# Altium PCB 四路12V30A无线遥控控制板.PcbDoc
Units mm, origin at the board's own origin, x right, y up, seen from the top; angles counter-clockwise.
Board outline 254.38 x 101.09 mm, 2 copper layers (Top Layer, Bottom Layer); 45 components, 31 nets, 137 pads, 8 vias.
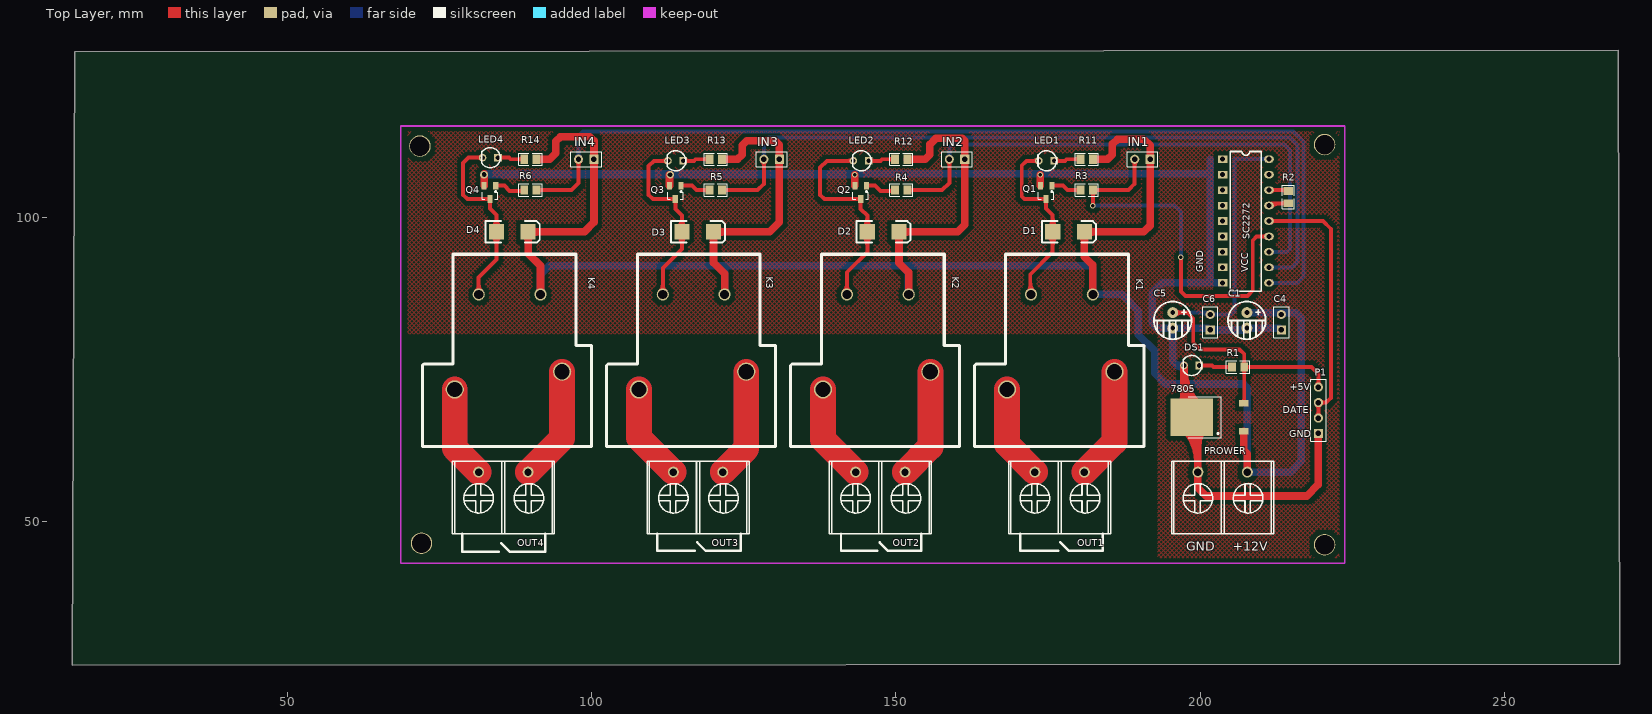
[diagram p0: Top Layer view]
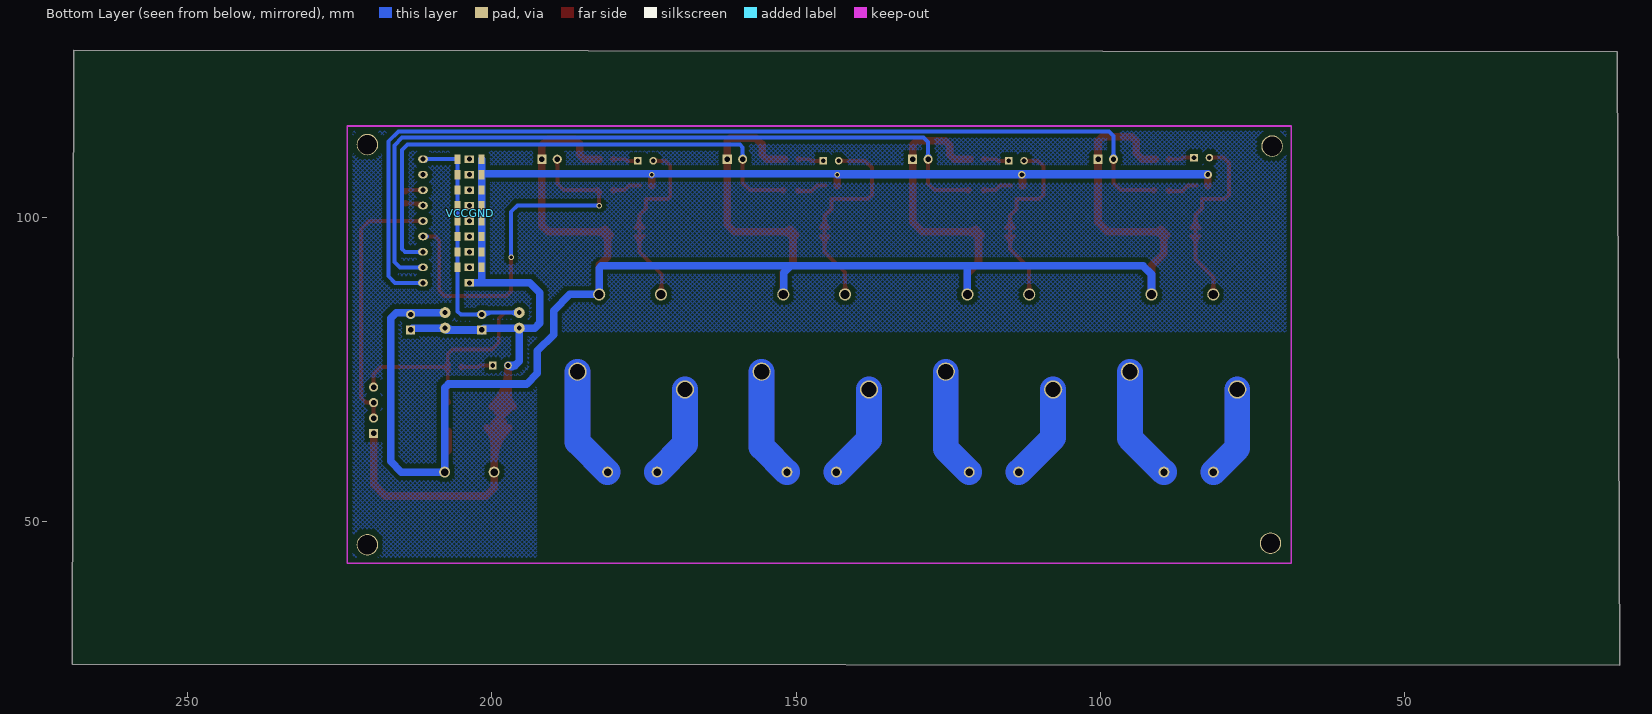
[diagram p1: Bottom Layer view, seen from below]

## Layer stack, top to bottom
Top Layer: signal copper 0.0356
Dielectric: dielectric 0.32, FR-4, Dk 4.8
Bottom Layer: signal copper 0.0356

## Board outline
14.605,26.416 268.986,26.543 268.732,127.508 14.986,127.254

## Design rules (kind name [scope] priority, off if disabled: settings)
Clearance [All] p1: gap=0.654
PolygonConnect [All] p1: connectstyle=Relief reliefconductorwidth=0.254 reliefentries=4 polygonreliefangle="90 Angle"
RoutingVias [All] p1: holewidth=0.711 width=1.27 viastyle="Through Hole" minholewidth=0.711 minwidth=1.27 maxholewidth=0.711 maxwidth=1.27
SilkscreenOverComponentPads [All] p1: minsilkscreentomaskgap=0.254
SolderMaskExpansion [All] p1: expansion=0.102
TestPointUsage [All] p1: valid=0 allowmultiple=FALSE
Testpoint [All] p1: side=15 testpointundercomponent=TRUE minsize=1.016 maxsize=2.54 preferedsize=1.524 minholesize=0 maxholesize=1.016 preferedholesize=0.813 testpointgrid=0.025 style=1023 order=0123456789
Width Width_2 [InNetClass('1mm')] p1: maxlimit=1.254 minlimit=1.254 preferedwidth=1.254
Width Width_1 [InNetClass('4mm')] p2: maxlimit=4.254 minlimit=4.254 preferedwidth=4.254
Width [All] p3: maxlimit=0.654 minlimit=0.654 preferedwidth=0.654
23 further rules are at their usual default settings.

## Classes and differential pairs
net class 4mm: NetK1_3 NetK1_4 NetK2_3 NetK2_4 NetK3_3 NetK3_4 NetK4_3 NetK4_4
net class 1mm: +12V GND

## Components (designator, comment, footprint, x,y, rotation, side; value= is the part's Value field where it differs from the comment)
7805 "SDWYG" 78XX 201.168,67.056 r90 top
C1 "DJDR" C-DJ-6 207.772,81.788 r270 top
C4 "CPDR" CPDR 213.36,82.804 r90 top
C5 "DJDR" C-DJ-6 195.58,81.788 r270 top
C6 "CPDR" CPDR 201.676,82.804 r90 top
D1 "ZL2JG" 7227 180.855,97.661 r0 top
D2 "ZL2JG" 7227 150.375,97.661 r0 top
D3 "ZL2JG" 7227 119.895,97.661 r0 top
D4 "ZL2JG" 7227 89.415,97.661 r0 top
DS1 "LED" LED_D 198.12,74.168 r180 top
GND "Header 8" P8 199.149,96.906 r180 top
IN1 "PZ_2" HDR-2 187.96,110.744 r180 top
IN2 "PZ_2" HDR-2 157.48,110.744 r180 top
IN3 "PZ_2" HDR-2 127,110.744 r180 top
IN4 "PZ_2" HDR-2 96.52,110.744 r180 top
K1 "JDQ1K" SLA-12VDC-SL-A 186.054,76.198 r180 top
K2 "JDQ1K" SLA-12VDC-SL-A 155.788,76.198 r180 top
K3 "JDQ1K" SLA-12VDC-SL-A 125.523,76.198 r180 top
K4 "JDQ1K" SLA-12VDC-SL-A 95.257,76.198 r180 top
LED1 "" LED_D 174.251,107.821 r180 top
LED2 "" LED_D 143.771,107.821 r180 top
LED3 "" LED_D 113.291,107.821 r180 top
LED4 "" LED_D 82.811,108.329 r180 top
OUT1 "PZ_2" KF8500-2 180.975,58.166 r270 top
OUT2 "PZ_2" KF8500-2 151.511,58.166 r270 top
OUT3 "PZ_2" KF8500-2 121.539,58.166 r270 top
OUT4 "PZ_2" KF8500-2 89.535,58.166 r270 top
P1 "Header 4" HDR1X4 219.456,64.516 r90 top
PROWER "PZ_2" KF8500-2 207.772,58.166 r270 top (schematic designator JP1)
Q1 "NPN" SO-G3 173.743,104.265 r180 top
Q2 "NPN" SO-G3 143.263,104.265 r180 top
Q3 "NPN" SO-G3 112.783,104.265 r180 top
Q4 "NPN" SO-G3 82.303,104.265 r180 top
R1 "Res" TP-0805-R 208.788,74.168 r0 top
R2 "Res2" TP-0805-R 213.233,100.838 r270 top
R3 "Res" TP-0805-R 183.903,103.249 r0 top
R4 "Res" TP-0805-R 153.423,103.249 r0 top
R5 "Res" TP-0805-R 122.943,103.249 r0 top
R6 "Res" TP-0805-R 92.463,103.249 r0 top
R11 "Res" TP-0805-R 183.903,108.329 r0 top
R12 "Res" TP-0805-R 153.423,108.329 r0 top
R13 "Res" TP-0805-R 122.943,108.329 r0 top
R14 "Res" TP-0805-R 92.463,108.329 r0 top
SC2272 "SC2272" DIP18 203.713,109.606 r0 top
VCC "Header 8" P8 203.097,96.906 r180 top

## Footprints (in the part's own frame and the unit in brackets; to place one, negate y for a bottom-side part, rotate by r counter-clockwise, add the part's x,y. Pads: shape width x height; smd on the part's side, far side on the other; paste and mask are expansions set on the pad)
78XX [mm] "78XX稳压器"
  rect 1.1x1.55 smd: 1(-2.186,-6.029) 2(2.414,-6.029)
  rect 6.2x7 smd: 3(0.127,2.54)
  silkscreen extent -3.24,-2.35 3.46,3.13
7227 [mm]
  rect 2.5x2.54 smd: 1(0.127,0) 2(-5.08,0)
  silkscreen extent -6.86,-1.78 2.03,1.78
C-DJ-6 [mm] "电容6mm"
  round 1.8 hole 0.8: 1(-2.591,-0.076) 2(-0.051,-0.076)
  silkscreen extent -4.42,-3.18 1.78,3.02
CPDR [mm] "瓷片电容"
  rect 1.5x1.5 hole 0.9: 1(-1.27,0)
  round 1.5 hole 0.9: 2(1.27,0)
  silkscreen extent -2.54,-1.27 2.54,1.27
DIP18 [mil] "直插18管脚"
  rect 62x49.21 hole 32: 1(-0.15,-0.04) 2(-0.15,-100.04) 3(-0.15,-200.04) 4(-0.15,-300.04) 5(-0.15,-400.04) 6(-0.15,-500.04) 7(-0.15,-600.04) 8(-0.15,-700.04) 9(0,-800)
  oval 62x49.21 hole 32: 10(300,-800) 11(300,-700) 12(300,-600) 13(300,-500) 14(300,-400) 15(300,-300) 16(300,-200) 17(300,-100) 18(300,0)
  silkscreen extent 50,-855 250,50
HDR1X4 [mm] "Connector; Header; 4 Position"
  rect 1.5x1.5 hole 0.9: 1(0,0)
  round 1.5 hole 0.9: 2(2.54,0) 3(5.08,0) 4(7.62,0)
  silkscreen extent -1.27,-1.27 8.89,1.27
HDR-2 [mm] "2排针"
  rect 1.5x1.5 hole 0.9: 1(-3.84,1.148)
  round 1.5 hole 0.9: 2(-1.3,1.148)
  silkscreen extent -5.11,-0.12 -0.03,2.42
KF8500-2 [mm] "2P螺丝端子"
  round 1.8 hole 1.2: 1(0,0) 2(0,-8.128)
  silkscreen extent -1.78,-12.45 10.16,4.32
LED_D [mm] "发光二极管_3mm"
  rect 1.25x1.25 hole 0.75: 1(-1.778,-1.524)
  round 1.25 hole 0.75: 2(0.762,-1.524)
  silkscreen extent -2.16,-3.17 0.89,0.13
P8 [mil] "裸露焊盘"
  rect 39.37x60 smd far side: 1(-100,200) 2(-100,100) 3(-100,0) 4(-100,-100) 5(-100,-200) 6(-100,-300) 7(-100,-400) 8(-100,-500)
SLA-12VDC-SL-A [mm] "继电器"
  round 2 hole 1.5: 1(3.683,-11.176) 2(13.843,-11.176)
  round 3 hole 2.5: 3(17.78,4.445) 4(0.127,1.524)
  silkscreen extent -4.7,-17.78 23.11,13.84
SO-G3 [mm] "贴片三极管"
  rect 0.85x1.3 smd: 1(-1.9,-0.983) 2(0,-0.983) 3(-0.95,1.217)
  silkscreen extent -2.23,-0.12 0.32,1.22
TP-0805-R [mm] "贴片0805"
  rect 1.3x1.5 smd: 1(-3.556,1.27) 2(-1.524,1.27)
  silkscreen extent -4.44,0.25 -0.64,2.29

## Part data
7805: "三端稳压器"
C1 C5: "电解电容"
C4 C6: "瓷片电容"
D1 D2 D3 D4: "整流二极管"
DS1: "发光二极管"
GND VCC: "Header, 8-Pin"
IN1 IN2 IN3 IN4 PROWER: "排针——2"
K1 K2 K3 K4: library part JDQYCK, "继电器——1常开1常闭"
LED1 LED2 LED3 LED4: library part LED, "发光二极管"
OUT1 OUT2 OUT3 OUT4: library part PZ_3, "排针——3"
P1: "Header, 4-Pin"
Q1 Q2 Q3 Q4: "NPN Bipolar Transistor"
R1 R3 R4 R5 R6 R11 R12 R13 R14: "电阻"
R2: "Resistor"
SC2272: "无线接收芯片"

## Free pads (board coordinates)
  round 3.524 hole 3.2: 0(71.755,111.76) 1(72.009,46.482) 2(220.472,112.014) 3(220.472,46.228)

## Via types
v1: diameter 0.9, hole 0.6, Top Layer to Bottom Layer, 6 vias
v2: diameter 1.27, hole 0.711, Top Layer to Bottom Layer, 2 vias

## Nets (pads, with @x,y where several pads share a name; then routed paths per layer and width w, separated by ;. In a path a pad name is that pad's centre, name@x,y a point inside that pad or via, vN(x,y) a via of type N, cw(c..) or ccw(c..) an arc to the next point about the centre after c; other vN are vias at no path point)
+5V: 7805.2 C5.1 C6.2 P1.4 R1.2 SC2272.18 VCC.1 VCC.2 VCC.3 VCC.4 VCC.5 VCC.6 VCC.7 VCC.8 | length 95.6
  Top Layer w0.654: C5.1 197.942,84.379 198.882,83.439 198.882,79.502 200.025,78.359 206.502,78.359 207.264,77.597 R1.2 ; C5.1@195.909,83.974 cw(c196.887,82.995) 196.887,84.379 cw(c196.887,85.762) C5.1@195.909,84.784 ; R1.2@207.036,75.11 cw(c206.484,74.558) 207.264,74.558 cw(c208.044,74.558) R1.2@207.492,75.11 ; R1.2@207.036,75.766 ccw(c206.484,76.318) 207.264,76.318 ccw(c208.044,76.318) R1.2@207.492,75.766 ; 7805.2@207.04,69.628 ccw(c206.498,70.17) 207.264,70.17 ; 7805.2 207.264,69.537 R1.2 ; R1.2@207.492,75.21 cw(c208.044,74.658) 208.044,75.438 cw(c208.044,76.218) R1.2@207.492,75.666 ; P1.4@219.157,72.435 ccw(c218.435,73.157) 219.456,73.157 ccw(c220.477,73.157) P1.4@219.755,72.435 ; P1.4 219.456,74.295 218.313,75.438 R1.2
  Bottom Layer w0.654: C5.1 201.371,84.379 C6.2 205.105,84.074 205.637,84.606 VCC.1 VCC.2 VCC.3 VCC.4 VCC.5 VCC.6 VCC.7 VCC.8 SC2272.18 ; C5.1@195.909,83.974 cw(c196.887,82.995) 196.887,84.379 cw(c196.887,85.762) C5.1@195.909,84.784 ; 199.919,84.379 cw(c199.919,82.317) C6.2@201.377,83.775 ; C6.2@201.975,83.775 cw(c202.697,83.053) 202.697,84.074 cw(c202.697,85.095) C6.2@201.975,84.373 ; SC2272.18@210.96,109.395 ccw(c210.451,108.887) 210.451,109.606 ccw(c210.451,110.325) SC2272.18@210.96,109.817
+12V: 7805.1 C1.1 C4.2 D1.1 D2.1 D3.1 D4.1 IN1.1 IN2.1 IN3.1 IN4.1 K1.1 K2.1 K3.1 K4.1 PROWER.1 R11.2 R12.2 R13.2 R14.2 | length 422
  Top Layer w1.254: D4.1@89.101,97.2 cw(c88.038,96.137) 89.542,96.137 cw(c91.046,96.137) D4.1@89.983,97.2 ; D4.1@89.983,97.22 cw(c91.046,96.157) 91.046,97.661 cw(c91.046,99.165) D4.1@89.983,98.102 ; R14.2 93.089,109.599 94.107,110.617 94.107,112.522 94.869,113.284 99.695,113.284 100.36,112.619 IN4.1 100.36,99.217 98.804,97.661 D4.1 89.542,94.1 91.574,92.068 K4.1 ; D3.1@119.581,97.2 cw(c118.518,96.137) 120.022,96.137 cw(c121.526,96.137) D3.1@120.463,97.2 ; D3.1@120.463,97.22 cw(c121.526,96.157) 121.526,97.661 cw(c121.526,99.165) D3.1@120.463,98.102 ; R13.2 123.95,109.599 124.714,110.363 124.714,111.887 125.476,112.649 130.175,112.649 130.84,111.984 IN3.1 130.84,99.217 129.284,97.661 D3.1 120.022,92.576 121.84,90.758 K3.1 ; D2.1@150.061,97.2 cw(c148.998,96.137) 150.502,96.137 cw(c152.006,96.137) D2.1@150.943,97.2 ; D2.1@150.943,97.22 cw(c152.006,96.157) 152.006,97.661 cw(c152.006,99.165) D2.1@150.943,98.102 ; R12.2 154.811,109.599 155.575,110.363 155.575,112.014 156.591,113.03 160.909,113.03 161.32,112.619 IN2.1 161.32,98.836 160.145,97.661 D2.1 150.502,92.576 152.105,90.973 K2.1 ; D1.1@180.541,97.2 cw(c179.478,96.137) 180.982,96.137 cw(c182.486,96.137) D1.1@181.423,97.2 ; D1.1@181.423,97.22 cw(c182.486,96.157) 182.486,97.661 cw(c182.486,99.165) D1.1@181.423,98.102 ; K1.1 182.371,92.203 180.982,93.592 D1.1 190.752,97.661 191.8,98.709 IN1.1 191.8,111.857 190.754,112.903 186.436,112.903 185.674,112.141 185.547,112.141 185.547,110.359 184.787,109.599 R11.2 ; 7805.1 207.197,61.789 207.772,61.214 PROWER.1
  Bottom Layer w1.254: K4.1 91.574,90.671 92.978,92.075 122.047,92.075 ; K3.1 121.84,91.868 122.047,92.075 ; 152.019,88.483 ccw(c153.214,88.483) K2.1@152.369,87.638 ; K2.1 152.019,87.46 152.019,90.932 150.876,92.075 ; C1.1 C4.2@213.055,84.379 ; 212.327,84.379 cw(c212.327,83.041) C4.2@213.273,83.987 ; C4.2 C4.2@213.055,84.379 ; C4.2@213.447,83.987 cw(c214.393,83.041) 214.393,84.379 ; 122.047,92.075 150.876,92.075 ; 150.876,92.075 181.991,92.075 182.371,91.695 K1.1 187.2,87.374 189.865,84.709 189.865,80.772 192.532,78.105 192.532,74.422 194.31,72.644 207.137,72.644 207.772,72.009 PROWER.1 214.884,58.166 216.662,59.944 216.662,83.439 215.722,84.379 213.36,84.379 C4.2@213.055,84.379
GND: 7805.3 C1.2 C4.1 C5.2 C6.1 DS1.2 GND.1 GND.2 GND.3 GND.4 GND.5 GND.6 GND.7 GND.8 P1.1 PROWER.2 Q1.2 Q2.2 Q3.2 Q4.2 SC2272.9 | length 369.3
  Top Layer w1.254: v1(82.296,107.188) 82.303,107.181 Q4.2 v2(82.303,107.061) ; v1(112.776,107.061) 112.783,107.054 Q3.2 112.783,106.941 112.84,106.998 v2(112.903,107.061) ; v1(143.256,107.061) 143.263,107.054 Q2.2 ; v1(173.736,107.061) 173.743,107.054 Q1.2 ; 7805.3@196.479,68.932 ccw(c194.358,71.053) 197.358,71.053 ; 7805.3@197.279,65.434 cw(c191.571,59.726) 199.644,59.726 ; 197.358,72.226 ccw(c203.271,72.226) 7805.3@199.09,68.045 ; DS1.2@197.358,75.254 ccw(c206.299,75.254) 7805.3@199.977,68.932 ; DS1.2 197.358,68.453 7805.3 199.644,66.167 PROWER.2 199.644,55.626 201.041,54.229 217.551,54.229 219.456,56.134 P1.1 ; 7805.3@198.166,66.321 cw(c194.598,62.753) 199.644,62.753 ; 199.644,62.7 cw(c203.511,62.7) 7805.3@200.777,65.434
  Bottom Layer w1.254: v1(82.296,107.188) 112.776,107.188 143.256,107.188 173.736,107.188 GND.7@201.567,107.188 ; v2(82.303,107.061) v1(112.776,107.061) ; v2(112.903,107.061) v1(143.256,107.061) ; v1(173.736,107.061) 173.863,107.188 GND.7@201.567,107.188 ; 196.075,75.832 ccw(c196.805,76.562) DS1.2@197.359,75.69 ; DS1.2 196.215,75.692 195.504,76.403 C5.2 ; 200.643,81.839 cw(c200.643,80.501) C6.1@201.589,81.447 ; GND.8 GND.7 ; SC2272.9 201.676,89.286 ; 206.301,81.534 ccw(c206.301,83.234) C1.2@207.503,82.032 ; 212.327,81.839 cw(c212.327,80.501) C4.1@213.273,81.447 ; C4.1 213.055,81.839 C1.2 207.391,81.534 C6.1 201.371,81.839 C5.2 ; C5.2 192.989,81.839 192.151,82.677 192.151,87.63 193.807,89.286 201.676,89.286 ; GND.7@201.567,107.188 201.689,107.188 GND.7 ; GND.7@201.567,107.188 GND.7 ; 201.676,89.286 201.689,89.299 GND.1 GND.2 GND.3 GND.4 GND.5 GND.6 GND.7
NetD1_2: D1.2 K1.2 LED1.2 Q1.3 | length 40.8
  Top Layer w0.654: K1.2@171.735,87.85 ccw(c170.89,88.695) 172.085,88.695 ; 172.085,89.303 ccw(c174.14,89.303) K1.2@172.687,87.85 ; K1.2 172.085,87.5 172.085,90.678 175.775,94.368 D1.2 175.775,100.45 174.693,101.532 Q1.3 171.145,103.048 170.688,103.505 170.688,108.585 171.448,109.345 LED1.2 ; LED1.2@173.278,109.134 ccw(c172.77,108.626) 172.77,109.345 ccw(c172.77,110.064) LED1.2@173.278,109.556 ; D1.2@175.122,96.988 cw(c173.547,95.413) 175.775,95.413 cw(c178.003,95.413) D1.2@176.428,96.988 ; D1.2@175.122,98.334 ccw(c173.547,99.909) 175.775,99.909 ccw(c178.003,99.909) D1.2@176.428,98.334
NetD2_2: D2.2 K2.2 LED2.2 Q2.3 | length 45.5
  Top Layer w0.654: K2.2@141.469,87.85 ccw(c140.321,88.999) 141.945,88.999 ccw(c143.57,88.999) K2.2@142.421,87.85 ; K2.2 141.945,91.018 145.295,94.368 D2.2 145.295,100.323 144.213,101.405 Q2.3 138.252,103.048 137.541,103.759 137.541,108.204 138.682,109.345 LED2.2 ; LED2.2@142.798,109.134 ccw(c142.29,108.626) 142.29,109.345 ccw(c142.29,110.064) LED2.2@142.798,109.556 ; D2.2@144.642,96.988 cw(c143.067,95.413) 145.295,95.413 cw(c147.523,95.413) D2.2@145.948,96.988 ; D2.2@144.642,98.334 ccw(c143.067,99.909) 145.295,99.909 ccw(c147.523,99.909) D2.2@145.948,98.334
NetD3_2: D3.2 K3.2 LED3.2 Q3.3 | length 41
  Top Layer w0.654: K3.2@111.204,87.85 ccw(c110.055,88.999) 111.68,88.999 ccw(c113.304,88.999) K3.2@112.156,87.85 ; K3.2 111.68,91.741 114.815,94.876 D3.2 114.815,100.323 113.733,101.405 Q3.3 110.058,103.048 109.347,103.759 109.347,108.458 110.234,109.345 LED3.2 ; LED3.2@112.318,109.134 ccw(c111.81,108.626) 111.81,109.345 ccw(c111.81,110.064) LED3.2@112.318,109.556 ; D3.2@114.162,96.988 cw(c112.587,95.413) 114.815,95.413 cw(c117.043,95.413) D3.2@115.468,96.988 ; D3.2@114.162,98.334 ccw(c112.587,99.909) 114.815,99.909 ccw(c117.043,99.909) D3.2@115.468,98.334
NetD4_2: D4.2 K4.2 LED4.2 Q4.3 | length 41.5
  Top Layer w0.654: K4.2@80.938,87.85 ccw(c79.789,88.999) 81.414,88.999 ccw(c83.039,88.999) K4.2@81.89,87.85 ; K4.2 81.414,90.177 84.335,93.098 D4.2 84.335,100.45 83.253,101.532 Q4.3 79.578,103.048 78.867,103.759 78.867,108.966 79.754,109.853 LED4.2 ; LED4.2@81.838,109.642 ccw(c81.33,109.134) 81.33,109.853 ccw(c81.33,110.572) LED4.2@81.838,110.064 ; D4.2@83.682,96.988 cw(c82.107,95.413) 84.335,95.413 cw(c86.563,95.413) D4.2@84.988,96.988 ; D4.2@83.682,98.334 ccw(c82.107,99.909) 84.335,99.909 ccw(c86.563,99.909) D4.2@84.988,98.334
NetDS1_1: DS1.1 R1.1 | length 7.8
  Top Layer w0.654: DS1.1 201.93,75.692 202.184,75.438 R1.1 ; DS1.1@200.109,75.481 cw(c200.617,74.973) 200.617,75.692 cw(c200.617,76.411) DS1.1@200.109,75.903 ; R1.1@205.004,75.21 ccw(c204.452,74.658) 204.452,75.438 ccw(c204.452,76.218) R1.1@205.004,75.666
NetK1_3: K1.3 OUT1.2 | length 31
  Top Layer w4.254: K1.3 168.274,62.739 OUT1.2
  Bottom Layer w4.254: K1.3 168.274,62.739 OUT1.2
NetK1_4: K1.4 OUT1.1 | length 37.1
  Top Layer w4.254: OUT1.1 185.927,63.118 K1.4
  Bottom Layer w4.254: OUT1.1 185.927,63.118 K1.4
NetK2_3: K2.3 OUT2.2 | length 31.6
  Top Layer w4.254: K2.3 138.008,63.541 OUT2.2
  Bottom Layer w4.254: K2.3 138.008,63.541 OUT2.2
NetK2_4: K2.4 OUT2.1 | length 36.5
  Top Layer w4.254: OUT2.1 155.661,62.316 K2.4
  Bottom Layer w4.254: OUT2.1 155.661,62.316 K2.4
NetK3_3: K3.3 OUT3.2 | length 31.9
  Top Layer w4.254: K3.3 107.743,63.834 OUT3.2
  Bottom Layer w4.254: K3.3 107.743,63.834 OUT3.2
NetK3_4: K3.4 OUT3.1 | length 36.2
  Top Layer w4.254: OUT3.1 125.396,62.023 K3.4
  Bottom Layer w4.254: OUT3.1 125.396,62.023 K3.4
NetK4_3: K4.3 OUT4.2 | length 30.4
  Top Layer w4.254: K4.3 77.477,62.096 OUT4.2
  Bottom Layer w4.254: K4.3 77.477,62.096 OUT4.2
NetK4_4: K4.4 OUT4.1 | length 37.7
  Top Layer w4.254: OUT4.1 95.13,63.761 K4.4
  Bottom Layer w4.254: OUT4.1 95.13,63.761 K4.4
NetLED1_1: LED1.1 R11.1 | length 6.8
  Top Layer w0.654: LED1.1 177.798,109.345 178.052,109.599 R11.1 ; LED1.1@176.24,109.134 cw(c176.748,108.626) 176.748,109.345 cw(c176.748,110.064) LED1.1@176.24,109.556 ; R11.1@180.119,109.371 ccw(c179.567,108.819) 179.567,109.599 ccw(c179.567,110.379) R11.1@180.119,109.827
NetLED2_1: LED2.1 R12.1 | length 6.8
  Top Layer w0.654: LED2.1 147.445,109.345 147.699,109.599 R12.1 ; LED2.1@145.76,109.134 cw(c146.268,108.626) 146.268,109.345 cw(c146.268,110.064) LED2.1@145.76,109.556 ; R12.1@149.639,109.371 ccw(c149.087,108.819) 149.087,109.599 ccw(c149.087,110.379) R12.1@149.639,109.827
NetLED3_1: LED3.1 R13.1 | length 6.8
  Top Layer w0.654: LED3.1 116.838,109.345 117.092,109.599 R13.1 ; LED3.1@115.28,109.134 cw(c115.788,108.626) 115.788,109.345 cw(c115.788,110.064) LED3.1@115.28,109.556 ; R13.1@119.159,109.371 ccw(c118.607,108.819) 118.607,109.599 ccw(c118.607,110.379) R13.1@119.159,109.827
NetLED4_1: LED4.1 R14.1 | length 6.8
  Top Layer w0.654: LED4.1 86.362,109.853 86.616,109.599 R14.1 ; LED4.1@84.8,109.642 cw(c85.308,109.134) 85.308,109.853 cw(c85.308,110.572) LED4.1@84.8,110.064 ; R14.1@88.679,109.371 ccw(c88.127,108.819) 88.127,109.599 ccw(c88.127,110.379) R14.1@88.679,109.827
NetP1_2: P1.2 P1.3 SC2272.14 | length 49.3
  Top Layer w0.654: SC2272.14 220.213,99.446 221.488,98.171 221.488,70.358 220.726,69.596 P1.3 P1.2 ; SC2272.14@211.706,99.235 cw(c212.215,98.727) 212.215,99.446 cw(c212.215,100.165) SC2272.14@211.706,99.657 ; P1.2@219.157,67.355 ccw(c218.435,68.077) 219.456,68.077 ccw(c220.477,68.077) P1.2@219.755,67.355 ; P1.3@219.157,69.297 cw(c218.435,68.575) 219.456,68.575 cw(c220.477,68.575) 219.755,69.297 cw(c220.477,68.575) 220.477,69.596 cw(c220.477,70.617) P1.3@219.755,69.895
NetQ1_1: Q1.1 R3.1 | length 6.2
  Top Layer w0.654: Q1.1 177.454,105.248 178.181,104.521 180.345,104.521 R3.1 ; 179.562,104.521 cw(c179.562,103.734) R3.1@180.119,104.291 ; 179.572,104.521 ccw(c179.572,105.294) R3.1@180.119,104.747
NetQ2_1: Q2.1 R4.1 | length 6.3
  Top Layer w0.654: Q2.1 146.593,105.248 147.447,104.394 149.742,104.394 R4.1 ; 149.027,104.394 ccw(c149.027,105.259) R4.1@149.639,104.647 ; 149.148,104.394 cw(c149.148,103.7) R4.1@149.639,104.191
NetQ3_1: Q3.1 R5.1 | length 6.2
  Top Layer w0.654: Q3.1 116.494,105.248 117.223,104.519 R5.1 ; R5.1@119.159,104.291 ccw(c118.607,103.739) 118.607,104.519 ccw(c118.607,105.299) R5.1@119.159,104.747
NetQ4_1: Q4.1 R6.1 | length 6.3
  Top Layer w0.654: Q4.1 85.633,105.248 86.487,104.394 88.782,104.394 R6.1 ; 88.067,104.394 ccw(c88.067,105.259) R6.1@88.679,104.647 ; 88.188,104.394 cw(c88.188,103.7) R6.1@88.679,104.191
NetR2_1: R2.1 SC2272.16 | length 5.3
  Top Layer w0.654: SC2272.16 214.371,104.526 R2.1 ; SC2272.16@211.706,104.315 cw(c212.215,103.807) 212.215,104.526 cw(c212.215,105.245) SC2272.16@211.706,104.737 ; 213.305,104.526 cw(c213.305,103.296) R2.1@214.175,104.166
NetR2_2: R2.2 SC2272.15 | length 6.1
  Top Layer w0.654: SC2272.15 211.709,102.362 R2.2 ; SC2272.15@211.706,101.775 cw(c213.123,100.359) 213.123,102.362 ; R2.2@214.175,102.134 ccw(c213.623,101.582) 213.623,102.362 ccw(c213.623,103.142) R2.2@214.175,102.59
O1: IN1.2 R3.2 SC2272.13 | length 71.4
  Top Layer w0.654: R3.2@182.151,104.191 cw(c181.599,103.639) 182.379,103.639 cw(c183.159,103.639) R3.2@182.607,104.191 ; v1(182.372,101.981) 182.379,101.974 182.379,101.981 R3.2 188.212,104.519 189.26,105.567 IN1.2 ; R3.2@182.607,104.291 cw(c183.159,103.739) 183.159,104.519 cw(c183.159,105.299) R3.2@182.607,104.747 ; IN1.2@188.961,109.297 cw(c188.239,108.575) 189.26,108.575 cw(c190.281,108.575) IN1.2@189.559,109.297 ; v1(196.85,93.472) 196.85,87.884 197.612,87.122 207.772,87.122 208.661,88.011 208.661,96.266 209.301,96.906 SC2272.13 ; SC2272.13@210.96,96.695 ccw(c210.451,96.187) 210.451,96.906 ccw(c210.451,97.625) SC2272.13@210.96,97.117
  Bottom Layer w0.654: v1(182.372,101.981) 195.834,101.981 196.85,100.965 v1(196.85,93.472) ; SC2272.13@210.688,96.906 SC2272.13
O2: IN2.2 R4.2 SC2272.12 | length 95.7
  Top Layer w0.654: R4.2 157.605,104.519 158.78,105.694 IN2.2 ; R4.2@152.127,104.291 cw(c152.679,103.739) 152.679,104.519 cw(c152.679,105.299) R4.2@152.127,104.747 ; IN2.2@158.481,109.297 cw(c157.759,108.575) 158.78,108.575 cw(c159.801,108.575) IN2.2@159.079,109.297
  Bottom Layer w0.654: IN2.2@158.481,109.895 ccw(c157.759,110.617) 158.78,110.617 ccw(c159.801,110.617) IN2.2@159.079,109.895 ; IN2.2 158.78,111.536 159.258,112.014 211.963,112.014 ; SC2272.12 214.254,94.366 214.757,94.869 214.757,111.125 213.868,112.014 211.963,112.014 ; 211.455,112.014 211.963,112.014 ; SC2272.12@211.706,94.155 cw(c212.215,93.647) 212.215,94.366 cw(c212.215,95.085) SC2272.12@211.706,94.577
O3: IN3.2 R5.2 SC2272.11 | length 132.5
  Top Layer w0.654: R5.2 127.252,104.519 128.3,105.567 IN3.2 ; R5.2@121.647,104.291 cw(c122.199,103.739) 122.199,104.519 cw(c122.199,105.299) R5.2@121.647,104.747 ; IN3.2@128.001,109.297 cw(c127.279,108.575) 128.3,108.575 cw(c129.321,108.575) IN3.2@128.599,109.297
  Bottom Layer w0.654: IN3.2@128.001,109.895 ccw(c127.279,110.617) 128.3,110.617 ccw(c129.321,110.617) IN3.2@128.599,109.895 ; IN3.2 128.3,112.425 129.032,113.157 214.757,113.157 216.027,111.887 216.027,92.71 215.143,91.826 SC2272.11 ; SC2272.11@211.706,91.615 cw(c212.215,91.107) 212.215,91.826 cw(c212.215,92.545) SC2272.11@211.706,92.037
O4: IN4.2 R6.2 SC2272.10 | length 169.2
  Top Layer w0.654: R6.2 96.645,104.519 97.82,105.694 IN4.2 ; R6.2@91.167,104.291 cw(c91.719,103.739) 91.719,104.519 cw(c91.719,105.299) R6.2@91.167,104.747 ; IN4.2@97.521,109.297 cw(c96.799,108.575) 97.82,108.575 cw(c98.841,108.575) IN4.2@98.119,109.297
  Bottom Layer w0.654: IN4.2@97.521,109.895 ccw(c96.799,110.617) 97.82,110.617 ccw(c98.841,110.617) IN4.2@98.119,109.895 ; IN4.2 97.82,113.441 98.552,114.173 215.392,114.173 217.043,112.522 217.043,90.424 215.905,89.286 SC2272.10 ; SC2272.10@211.706,89.075 cw(c212.215,88.567) 212.215,89.286 cw(c212.215,90.005) SC2272.10@211.706,89.497
pads on no net: SC2272.1 SC2272.2 SC2272.3 SC2272.4 SC2272.5 SC2272.6 SC2272.7 SC2272.8 SC2272.17

## Polygon pours and split planes (outlines as drawn)
no net on Top Layer "Top Layer-No Net" (hatched 45Degree grid 0.508 track 0.203): 69.469,114.3 69.723,114.046 69.723,80.899 192.913,80.899 193.04,80.772 193.04,43.815 223.393,43.815 223.647,43.561 223.52,43.688 223.52,114.046 223.266,114.3 69.469,114.3
no net on Bottom Layer "Top Layer-No Net" (hatched 45Degree grid 0.508 track 0.203): 69.088,114.554 69.342,114.3 69.342,81.153 192.532,81.153 192.659,81.026 192.659,44.069 223.012,44.069 223.266,43.815 223.139,43.942 223.139,114.3 222.885,114.554 69.088,114.554

## Keep-outs
Keep-Out Layer:
  lines w0.254: 68.58,43.18 68.58,115.062 223.774,115.062 223.774,43.18 68.58,43.18

## Silkscreen, mask and mechanical layers (free items; w line width, h text height)
Top Overlay:
  lines w0.4: 78.74,48.006 78.74,45.085 84.709,45.085 ; 85.09,46.482 86.487,45.085 86.614,45.085 92.329,45.085 92.329,48.006 ; 110.744,48.006 110.744,45.212 116.967,45.212 ; 117.348,46.609 118.745,45.212 118.872,45.212 124.46,45.212 124.46,48.006 ; 140.97,48.006 140.97,45.212 146.939,45.212 ; 147.32,46.609 148.717,45.212 148.844,45.212 154.178,45.212 154.178,48.006 ; 170.434,48.006 170.434,45.212 176.657,45.212 ; 177.038,46.609 178.435,45.212 178.562,45.212 184.023,45.212 184.023,48.006
  text "+5V" at 214.757,71.628 h1.12
  text "DATE" at 213.614,67.818 h1.12
  text "GND" at 214.63,63.881 h1.12
  text "GND" at 197.739,45.212 h1.52
  text "+12V" at 205.359,45.212 h1.52
Mechanical 1:
  lines w0.25: 223.647,43.18 95.25,43.18 68.58,43.18 68.58,115.062 95.25,115.062 223.774,115.062 223.774,43.18
  lines w0.254: 65.532,44.704 66.04,43.18 ; 65.532,113.538 66.04,115.062 ; 65.786,43.18 66.294,43.18 ; 65.786,115.062 66.294,115.062 ; 66.04,71.224 66.04,43.18 ; 66.04,87.018 66.04,115.062 ; 66.548,44.704 66.04,43.18 ; 66.548,113.538 66.04,115.062 ; 68.58,116.586 68.58,117.094 ; 70.104,116.332 68.58,116.84 ; 70.104,117.348 68.58,116.84 ; 137.645,116.84 68.58,116.84 ; 154.709,116.84 223.774,116.84 ; 222.25,116.332 223.774,116.84 ; 222.25,117.348 223.774,116.84 ; 223.774,116.586 223.774,117.094
  text "155.194 (mm)" at 137.899,115.926 h1.52
  text "71.882 (mm)" at 66.954,71.478 h1.52 r90